# Altium PCB V1_motor driver.PcbDoc
Units mm, origin at the board's own origin, x right, y up, seen from the top; angles counter-clockwise.
Board outline 95 x 120 mm, 2 copper layers (Top Layer, Bottom Layer); 120 components, 81 nets, 314 pads, 68 vias.
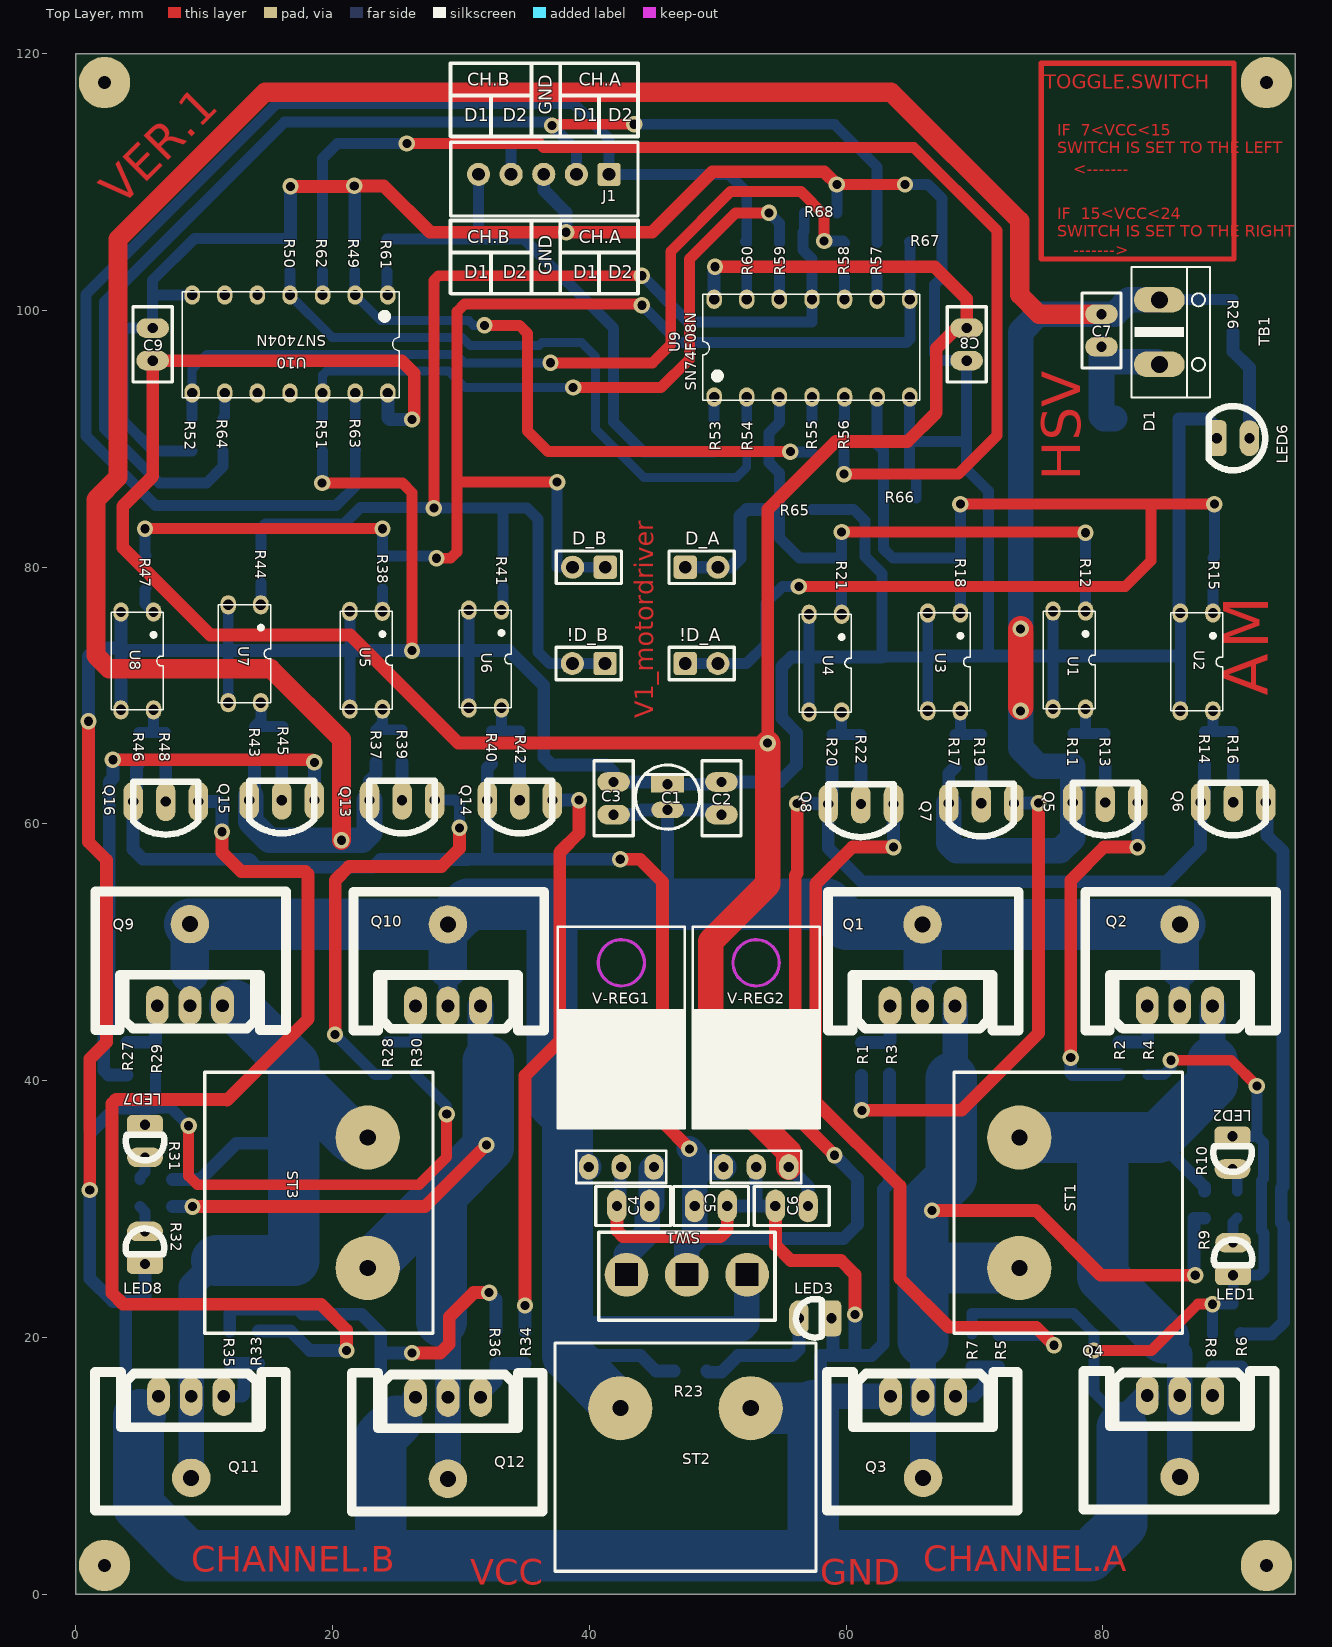
[diagram p0: Top Layer view]
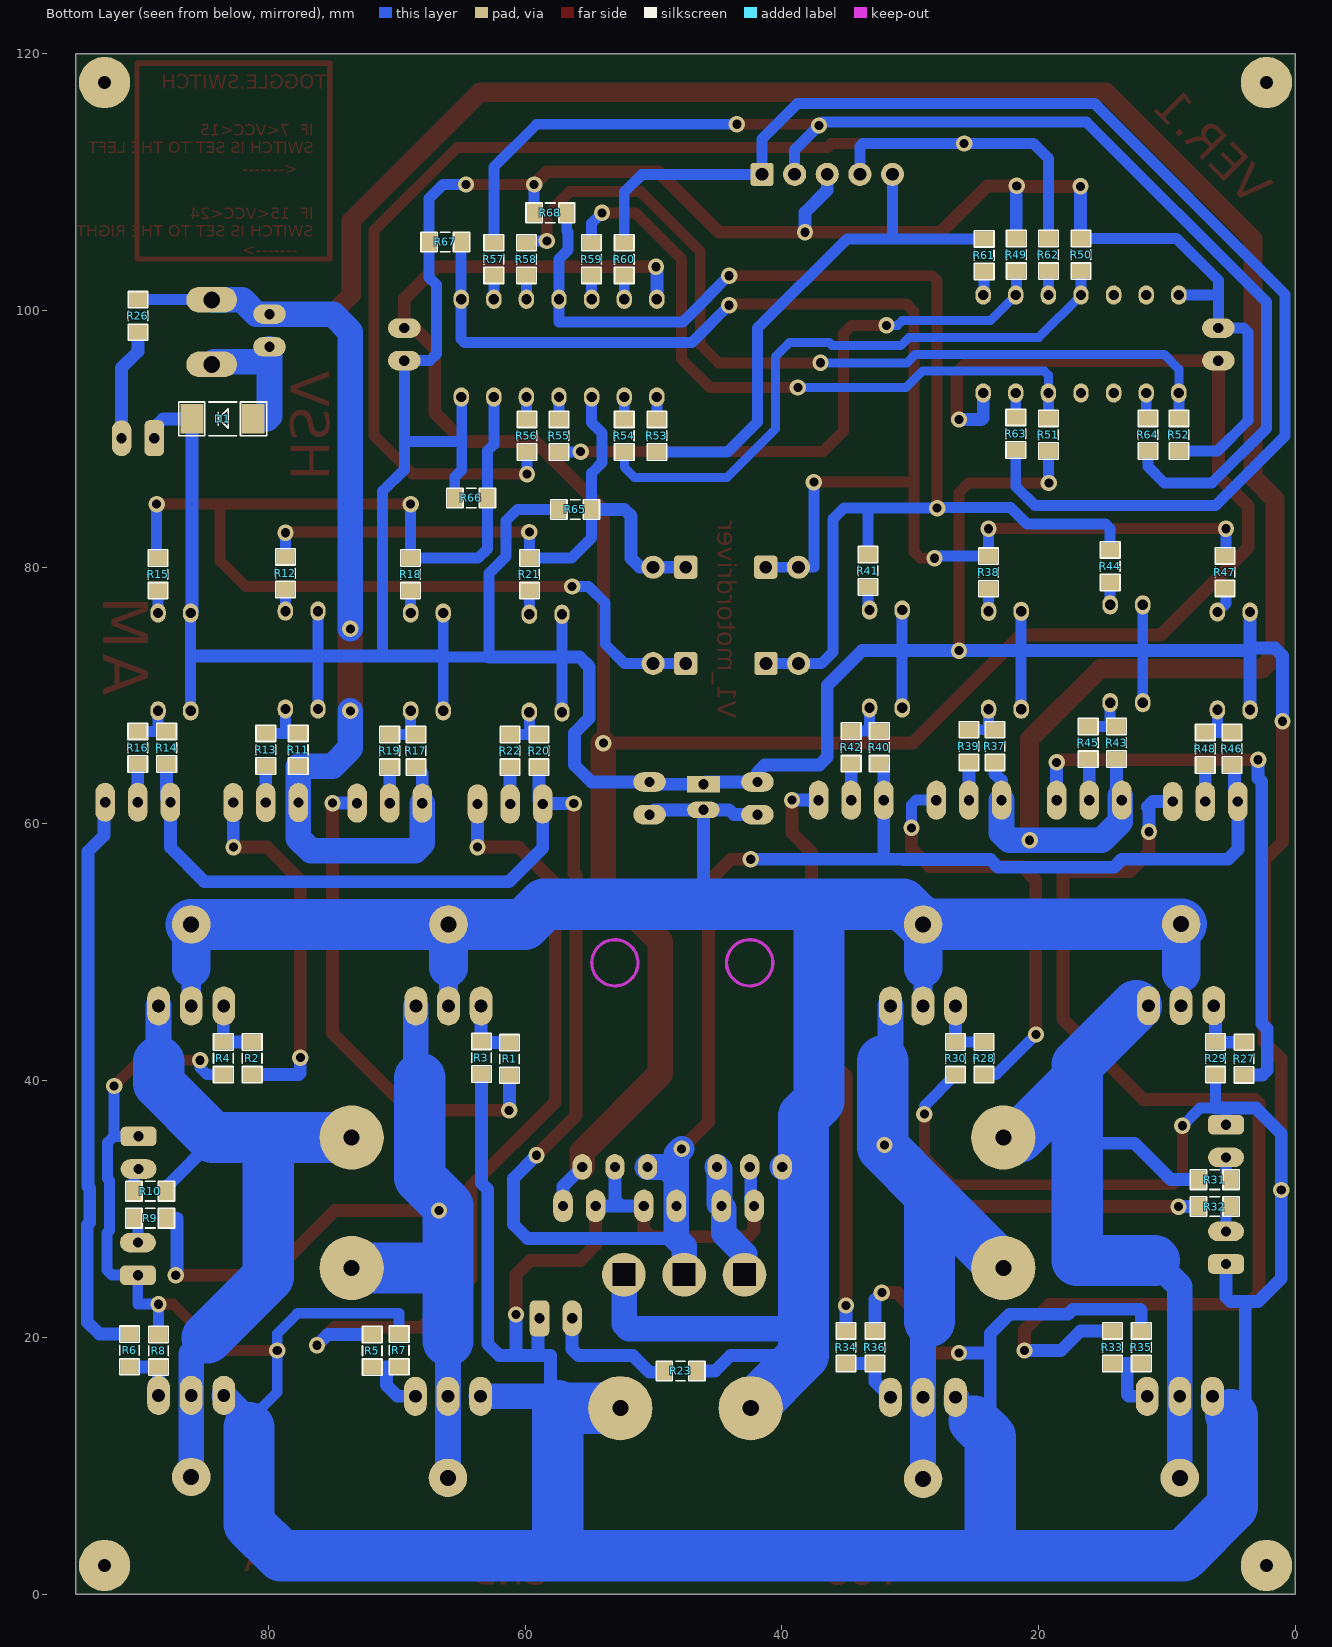
[diagram p1: Bottom Layer view, seen from below]
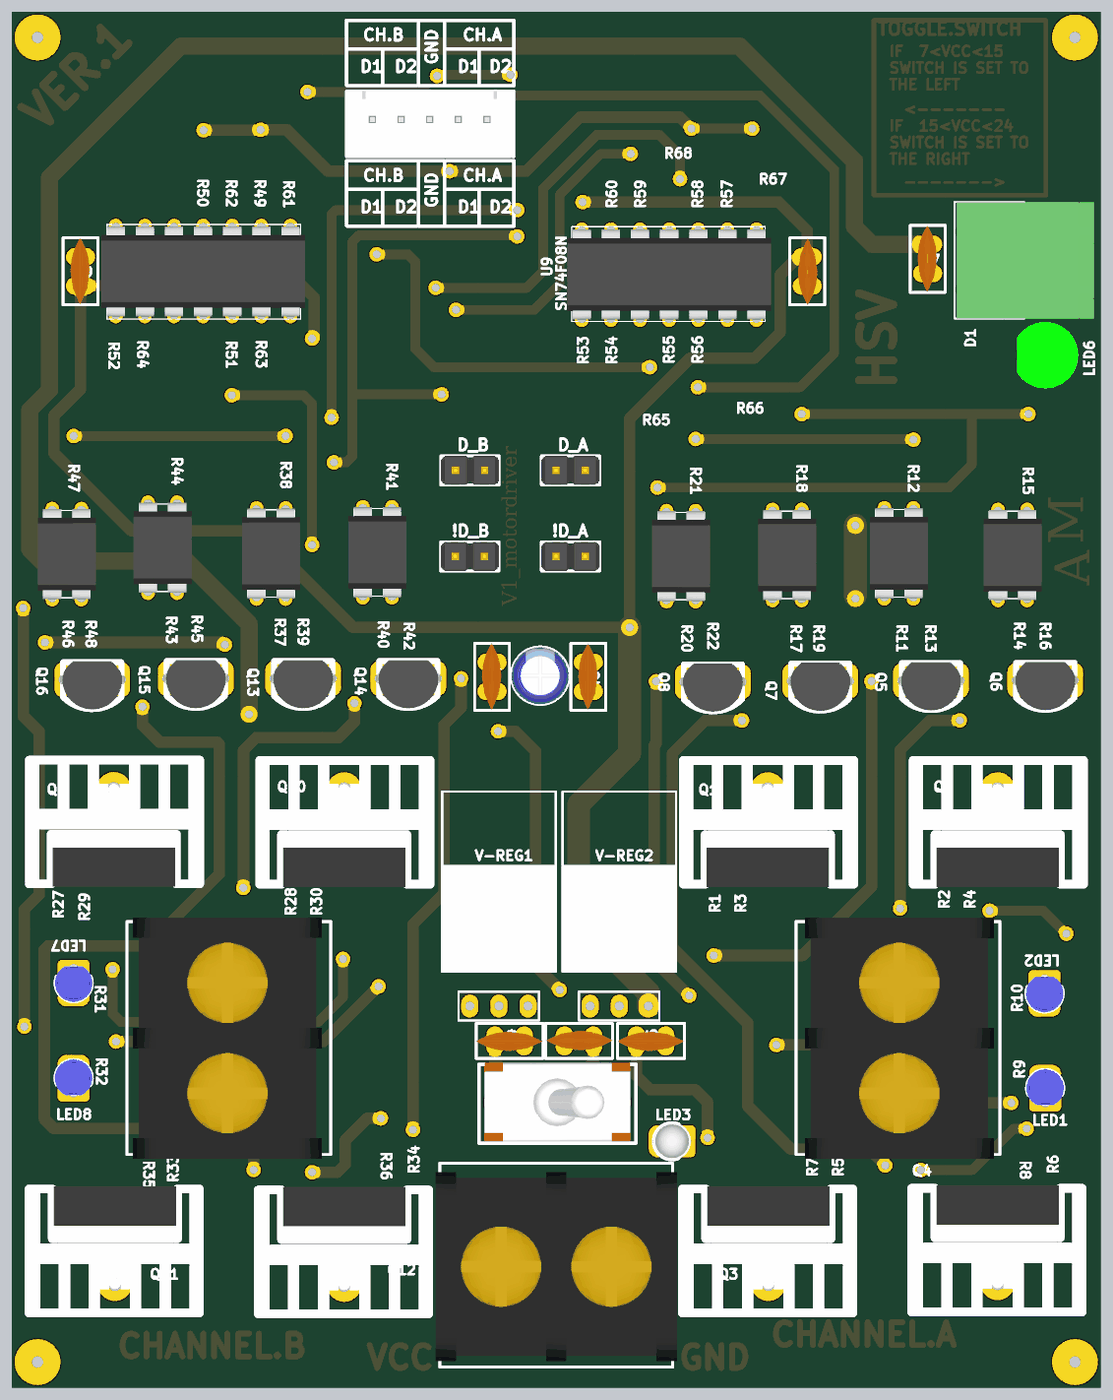
[diagram p2: 3D render of the assembled board from above, using the file's embedded part models]
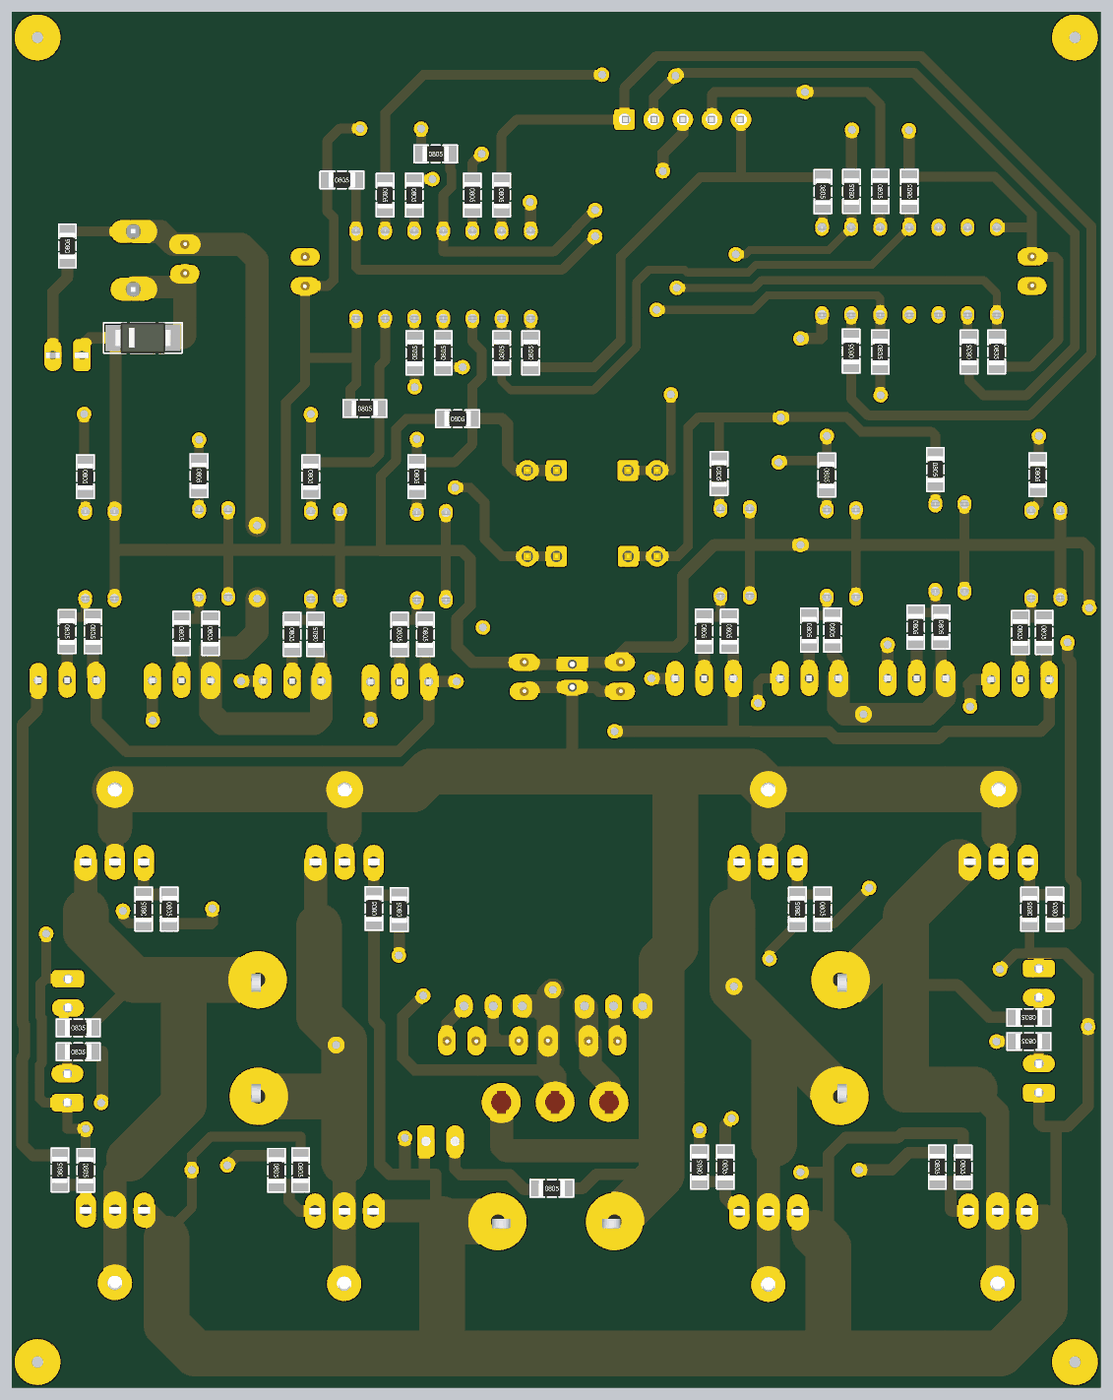
[diagram p3: 3D render of the assembled board from below, using the file's embedded part models]

## Layer stack, top to bottom
Top Solder: solder mask 0.0102, Solder Resist, Dk 3.5
Top Layer: signal copper 0.0356
Dielectric 1: dielectric 0.32, FR-4, Dk 4.8
Bottom Layer: signal copper 0.0356
Bottom Solder: solder mask 0.0102, Solder Resist, Dk 3.5

## Board outline
0,0 95,0 95,120 0,120

## Design rules (kind name [scope] priority, off if disabled: settings)
Clearance [All] p1: gap=0.6 ignorepadtopadclearanceinfootprint=FALSE
PolygonConnect [All] p1: connectstyle=Relief reliefconductorwidth=0.254 reliefentries=4 polygonreliefangle="90 Angle" airgapwidth=0.254
RoutingVias [All] p1: holewidth=0.6 width=1.3 viastyle="Through Hole" minholewidth=0.711 minwidth=1.27 maxholewidth=0.711 maxwidth=1.27
SolderMaskExpansion [All] p1: expansion=0.102
UnRoutedNet [All] p1: checkbadconnections=TRUE
Width [All] p1: maxlimit=10 minlimit=0.7 preferedwidth=0.85
29 further rules are at their usual default settings.

## Classes and differential pairs
component class RLS: Q6 Q14 R14 R15 R16 R40 R41 R42 U2 U6
component class RHS: D_A D_B Q5 Q13 R11 R12 R13 R37 R38 R39 U1 U5
component class POWER: C1 C2 C3 C4 C5 C6 C7 D1 LED3 LED6 R23 R26 ST2 SW1 TB1 V-REG1 V-REG2
component class LOGIC: C8 C9 J1 R49 R50 R51 R52 R53 R54 R55 R56 R57 R58 R59 R60 R61 R62 R63 R64 R65 R66 R67 R68 U9 U10
component class LLS: Q8 Q16 R20 R21 R22 R46 R47 R48 U4 U8
component class LHS: !D_A !D_B Q7 Q15 R17 R18 R19 R43 R44 R45 U3 U7
component class H_bridge: LED1 LED2 LED7 LED8 Q1 Q2 Q3 Q4 Q9 Q10 Q11 Q12 R1 R2 R3 R4 R5 R6 R7 R8 R9 R10 R27 R28 R29 R30 R31 R32 R33 R34 R35 R36 ST1 ST3

## Components (designator, comment, footprint, x,y, rotation, side; value= is the part's Value field where it differs from the comment)
!D_A "Header 2" "PINHEADER X2" 48.75,72.5 r0 top
!D_B "Header 2" "PINHEADER X2" 39.96,72.5 r180 top
C1 "100uF" "ECAP 5X11X2MM" 46.1,62.1 r90 top
C2 "100nF" "CCAP 0.1 N Y" 50.3,62 r90 top
C3 "100nF" "CCAP 0.1 N Y" 41.9,62 r90 top
C4 "1uF" "CCAP 0.1 N Y" 43.43,30.25 r180 top
C5 "100nF" "CCAP 0.1 N Y" 49.48,30.25 r0 top
C6 "1uF" "CCAP 0.1 N Y" 55.77,30.25 r180 top
C7 "1uF" "CCAP 0.1 N Y" 79.9,98.44 r90 top
C8 "100nF" "CCAP 0.1 N Y" 69.4,97.355 r270 top
C9 "100nF" "CCAP 0.1 N Y" 6,97.355 r90 top
D1 "DIODE" "DIODE SMD" 83.552,91.563 r90 bottom
D_A "Header 2" "PINHEADER X2" 48.75,80 r0 top
D_B "RHS_2" "PINHEADER X2" 39.98,80 r180 top
J1 "DATA CONNECTOR *5" "MOLEX *5_DATA CONNECTOR" 36.46,110.6 r180 top
LED1 "LED" "LED 3MM BLUE" 90.15,26.13 r270 top
LED2 "LED" "LED 3MM BLUE" 90.1,34.4 r90 top
LED3 "LED" "LED 3MM GREEN" 57.6,21.5 r0 top
LED6 "LED" "LED 5MM GREEN" 90.15,90.05 r180 top
LED7 "LED" "LED 3MM BLUE" 5.4,35.3 r90 top
LED8 "LED" "LED 3MM BLUE" 5.4,27 r270 top
Q1 "IRF3205" "Transistor - duplicate2" 65.96,49 r0 top
Q2 "IRF3205" "Transistor - duplicate2" 86,49 r0 top
Q3 "IRF3205" "Transistor - duplicate2" 66,12.25 r180 top
Q4 "IRF3205" "Transistor - duplicate2" 86,12.325 r180 top
Q5 "BC327" "Transistor - duplicate3" 80.19,61.67 r180 top
Q6 "BC327" "Transistor - duplicate3" 90.16,61.694 r180 top
Q7 "BC327" "Transistor - duplicate3" 70.54,61.624 r180 top
Q8 "BC327" "Transistor - duplicate3" 61.16,61.559 r180 top
Q9 "IRF3205" "Transistor - duplicate2" 8.9,49.025 r0 top
Q10 "IRF3205" "Transistor - duplicate2" 29,49 r0 top
Q11 "IRF3205" "Transistor - duplicate2" 9,12.25 r180 top
Q12 "IRF3205" "Transistor - duplicate2" 29,12.175 r180 top
Q13 "BC327" "Transistor - duplicate3" 25.426,61.854 r180 top
Q14 "BC327" "Transistor - duplicate3" 34.596,61.854 r180 top
Q15 "BC327" "Transistor - duplicate3" 16.056,61.86 r180 top
Q16 "BC327" "Transistor - duplicate3" 7.02,61.75 r180 top
R1 "1.6R" "RESISTOR _9" 61.2,41.7 r0 bottom
R2 "1.6R" "RESISTOR _9" 81.25,41.75 r180 bottom
R3 "10K" "RESISTOR _9" 63.4,41.8 r0 bottom
R4 "10K" "RESISTOR _9" 83.5,41.75 r0 bottom
R5 "1.6R" "RESISTOR _9" 71.9,18.97 r180 bottom
R6 "1k" "RESISTOR _9" 90.8,19 r0 bottom
R7 "10K" "RESISTOR _9" 69.8,19 r180 bottom
R8 "10K" "RESISTOR _9" 88.54,18.97 r180 bottom
R9 "1k" "RESISTOR _9" 89.2,29.3 r90 bottom
R10 "1k" "RESISTOR _9" 89.2,31.4 r90 bottom
R11 "10K" "RESISTOR _9" 77.66,65.786 r180 bottom
R12 "330R" "RESISTOR _9" 78.66,79.536 r180 bottom
R13 "1k" "RESISTOR _9" 80.19,65.786 r180 bottom
R14 "10K" "RESISTOR _9" 87.91,65.944 r180 bottom
R15 "330R" "RESISTOR _9" 88.58,79.444 r180 bottom
R16 "1k" "RESISTOR _9" 90.16,65.944 r180 bottom
R17 "10K" "RESISTOR _9" 68.5,65.694 r0 bottom
R18 "330R" "RESISTOR _9" 68.91,79.444 r180 bottom
R19 "1k" "RESISTOR _9" 70.54,65.694 r180 bottom
R20 "10K" "RESISTOR _9" 58.91,65.694 r180 bottom
R21 "330R" "RESISTOR _9" 59.66,79.444 r180 bottom
R22 "1k" "RESISTOR _9" 61.16,65.694 r180 bottom
R23 "1k" "RESISTOR _9" 47.888,17.4 r90 bottom
R26 "1k" "RESISTOR _9" 90.15,99.57 r0 bottom
R27 "1.6R" "RESISTOR _9" 4,41.73 r0 bottom
R28 "1.6R" "RESISTOR _9" 24.25,41.75 r180 bottom
R29 "10K" "RESISTOR _9" 6.21,41.75 r0 bottom
R30 "10K" "RESISTOR _9" 26.46,41.75 r0 bottom
R31 "1k" "RESISTOR _9" 6.27,32.3 r270 bottom
R32 "1k" "RESISTOR _9" 6.27,30.2 r270 bottom
R33 "1.6R" "RESISTOR _9" 14.25,19.25 r180 bottom
R34 "1k" "RESISTOR _9" 35,19.25 r0 bottom
R35 "10K" "RESISTOR _9" 12,19.25 r180 bottom
R36 "10K" "RESISTOR _9" 32.75,19.25 r180 bottom
R37 "10K" "RESISTOR _9" 23.396,66.07 r180 bottom
R38 "330R" "RESISTOR _9" 23.896,79.59 r180 bottom
R39 "1k" "RESISTOR _9" 25.426,66.07 r180 bottom
R40 "10K" "RESISTOR _9" 32.404,65.974 r180 bottom
R41 "330R" "RESISTOR _9" 33.293,79.724 r180 bottom
R42 "1k" "RESISTOR _9" 34.596,65.974 r180 bottom
R43 "10K" "RESISTOR _9" 13.926,66.33 r180 bottom
R44 "330R" "RESISTOR _9" 14.426,80.08 r180 bottom
R45 "1k" "RESISTOR _9" 16.136,66.32 r180 bottom
R46 "10K" "RESISTOR _9" 4.94,65.87 r180 bottom
R47 "330R" "RESISTOR _9" 5.49,79.62 r180 bottom
R48 "1K" "RESISTOR _9" 7.02,65.87 r180 bottom
R49 "10K" "RESISTOR _9" 21.736,104.325 r0 bottom
R50 "10K" "RESISTOR _9" 16.696,104.325 r0 bottom
R51 "10K" "RESISTOR _9" 19.236,90.325 r180 bottom
R52 "10K" "RESISTOR _9" 9.076,90.325 r180 bottom
R53 "22R" "RESISTOR _9" 49.73,90.25 r0 bottom
R54 "22R" "RESISTOR _9" 52.27,90.25 r0 bottom
R55 "22R" "RESISTOR _9" 57.35,90.25 r0 bottom
R56 "22R" "RESISTOR _9" 59.85,90.25 r0 bottom
R57 "22R" "RESISTOR _9" 62.43,104 r180 bottom
R58 "22R" "RESISTOR _9" 59.89,104 r180 bottom
R59 "22R" "RESISTOR _9" 54.81,104 r180 bottom
R60 "22R" "RESISTOR _9" 52.27,104 r180 bottom
R61 "22R" "RESISTOR _9" 24.236,104.305 r180 bottom
R62 "22R" "RESISTOR _9" 19.236,104.325 r180 bottom
R63 "22R" "RESISTOR _9" 21.776,90.405 r0 bottom
R64 "22R" "RESISTOR _9" 11.486,90.325 r0 bottom
R65 "10K" "RESISTOR _9" 56.1,84.5 r90 bottom
R66 "10K" "RESISTOR _9" 64.2,85.4 r90 bottom
R67 "10K" "RESISTOR _9" 66.2,105.33 r90 bottom
R68 "10K" "RESISTOR _9" 58.02,107.6 r90 bottom
ST1 "SCREW TERMINAL" "SCREW TERMINAL" 73.5,30.5 r90 top
ST2 "SCREW TERMINAL" "SCREW TERMINAL" 47.5,14.5 r0 top
ST3 "SCREW TERMINAL" "SCREW TERMINAL" 22.75,30.5 r270 top
SW1 "Toggle Switch" "Toggle 3 pins" 47.6,24.9 r180 top
TB1 "Terminal block 2 pin" "AK500/2 - pluggable" 84.4,98.315 r90 top
U1 "PC817" "IC X4 PIN" 77.39,72.77 r270 top
U2 "PC817" "IC X4 PIN" 87.31,72.624 r270 top
U3 "PC817" "IC X4 PIN" 67.64,72.624 r270 top
U4 "PC817" "IC X4 PIN" 58.39,72.524 r270 top
U5 "PC817" "IC X4 PIN" 22.626,72.754 r270 top
U6 "PC817" "IC X4 PIN" 31.896,72.854 r270 top
U7 "PC817" "IC X4 PIN" 13.156,73.26 r270 top
U8 "PC817" "IC X4 PIN" 4.8,72.7 r270 top
U9 "SN74F08N" "IC X14 PIN" 57.35,97.06 r90 top
U10 "SN7404N" "IC X14 PIN" 16.696,97.385 r270 top
V-REG1 "7812" V-REG 42.5,33.29 r0 top
V-REG2 "7805" V-REG 53,33.29 r0 top

## Footprints (in the part's own frame and the unit in brackets; to place one, negate y for a bottom-side part, rotate by r counter-clockwise, add the part's x,y. Pads: shape width x height; smd on the part's side, far side on the other; paste and mask are expansions set on the pad)
"AK500/2 - pluggable" [mil]
  oval 78x156 hole 52: 1(99,0) 2(-99,0)
  silkscreen extent -200,-155 200,85, body extent -200,-394 200,79, height 336
"CCAP 0.1 N Y" [mil] "CERAMIC CAP"
  oval 60x100 hole 31.5: 1(-50,0) 2(50,0)
  silkscreen extent -115,-60 115,60, body extent -114,-32 116,35, height 265
"DIODE SMD" [mil]
  rect 90x70 smd: A(0.5,-94) K(-0.5,94)
  silkscreen extent -53,-135 52,135, body extent -53,-98 53,99, height 87
"ECAP 5X11X2MM" [mm] "polarized cap"
  oval 1.27x2.54 hole 0.8: A(-1,0)
  rect 1.27x2.54 hole 0.8: K(1,0)
  silkscreen extent -2.5,-2.5 2.5,2.5, body extent -2.5,-2.5 2.5,2.5, height 11.26
"IC X4 PIN" [mm]
  oval 1.5x1.2 hole 0.8: 1(-3.81,1.27) 2(-3.81,-1.27) 3(3.81,-1.27) 4(3.81,1.27)
  silkscreen extent -3.81,-2.03 3.81,2.03, body extent -3.93,-2.54 3.93,2.54, height 4.19
"IC X14 PIN" [mm]
  oval 1.5x1.2 hole 0.8: 1(-3.81,7.62) 2(-3.81,5.08) 3(-3.81,2.54) 4(-3.81,0) 5(-3.81,-2.54) 6(-3.81,-5.08) 7(-3.81,-7.62) 8(3.81,-7.62) 9(3.81,-5.08) 10(3.81,-2.54) 11(3.81,0) 12(3.81,2.54) 13(3.81,5.08) 14(3.81,7.62)
  silkscreen extent -4.06,-8.38 4.19,8.51, body extent -3.9,-8.89 3.97,8.89, height 4.1
"LED 3MM BLUE" [mil]
  oval 60x110 hole 31.5: A(-50,0)
  rrect50% 60x110 hole 31.5: K(50,0)
  silkscreen extent -59,-59 20,59, body extent -65,-65 61,65, height 183
"LED 3MM GREEN" [mil]
  oval 60x110 hole 31.5: A(-50,0)
  rrect50% 60x110 hole 31.5: K(50,0)
  silkscreen extent -59,-59 20,59, body extent -65,-65 65,65, height 204
"LED 5MM GREEN" [mil]
  oval 60x110 hole 31.5: A(-50,0)
  rrect50% 60x110 hole 31.5: K(50,0)
  silkscreen extent -98,-98 75,98, body extent -114,-114 98,114, height 346
"MOLEX *5_DATA CONNECTOR" [mm]
  rrect25% 1.8x1.8 hole 1: 1(-5.08,0)
  round 1.8 hole 1: 2(-2.54,0) 3(0,0) 4(2.54,0) 5(5.08,0)
  silkscreen extent -7.34,-2.49 7.25,3.25, body extent -7.34,-2.49 7.34,3.35, height 7.21
"PINHEADER X2" [mm]
  rrect25% 1.8x1.8 hole 1: 1(-1.27,0)
  round 1.8 hole 1: 2(1.27,0)
  silkscreen extent -2.54,-1.27 2.54,1.27, body extent -2.54,-1.27 2.54,1.27, height 9.5
"RESISTOR _9" [mil]
  rect 56x46 smd: 1(0,50) 2(0,-50)
  silkscreen extent -30,-75 30,75, body extent -27,-45 27,45, height 28
"SCREW TERMINAL" [mm]
  round 5 hole 1.25: 1(-5.08,0) 2(5.08,0)
  silkscreen extent -10.16,-12.7 10.16,5.08, body extent -10.53,-12.18 10.52,4.32, height 18.5
"Toggle 3 pins" [mm]
  round 3.4 hole 1.75 square: 1(-4.699,0) 2(0,0) 3(4.699,0)
  silkscreen extent -6.86,-3.3 6.86,3.56, body extent -6.35,-3.43 6.35,3.43, height 28.75
"Transistor - duplicate2" [mm] "TO-220_HS"
  oval 1.778x3.048 hole 1: 1(-2.54,-3.175) 2(0,-3.175) 3(2.54,-3.175)
  round 3 hole 1.25: 2(0,3.175)
  silkscreen extent -7.37,-5.08 7.49,5.72, body extent -7.49,-5.33 7.51,5.67, height 20
"Transistor - duplicate3" [mil] "TO-92-S"
  oval 60x120 hole 31.5: 1(100,0) 2(0,0) 3(-100,0)
  silkscreen extent -100,-60 100,101, body extent -110,-63 110,102, height 294
V-REG [mm]
  oval 1.5x2 hole 0.8: 1(-2.54,0) 2(0,0) 3(2.54,0)
  Keep-Out Layer circle w0.254: c0,15.9 r1.8
  silkscreen extent -4.95,-1.25 4.95,18.7

## Part data
!D_A !D_B D_A: "Header, 2-Pin", LatestRevisionDate=17-Jul-2002, LatestRevisionNote="Re-released for DXP Platform.", Publisher="Altium Limited"
C1: library part "CAP POL"
C2 C3 C4 C5 C6 C7 C8 C9: library part "CERAMIC CAP"
D_B: library part "Header 2", "Header, 2-Pin", LatestRevisionDate=17-Jul-2002, LatestRevisionNote="Re-released for DXP Platform.", Publisher="Altium Limited"
J1: "Data Cable JST 5-pin"
Q1 Q2 Q3 Q4 Q9 Q10 Q11 Q12: library part MOSFET-N, "N CHANNEL MOSFET"
Q5 Q6 Q7 Q8 Q13 Q14 Q15 Q16: library part PNP
R1 R2 R3 R4 R5 R6 R7 R8 R9 R10 R11 R12 R13 R14 R15 R16 R17 R18 R19 R20 R21 R22 R23 R26 R27 R28 R29 R30 R31 R32 R33 R34 R35 R36 R37 R38 R39 R40 R41 R42 R43 R44 R45 R46 R47 R48 R49 R50 R51 R52 R53 R54 R55 R56 R57 R58 R59 R60 R61 R62 R63 R64 R65 R66 R67 R68: library part RESISTOR
ST1 ST2 ST3: "Barrier Terminal Block 2 Pin with cover 300V/25A"
SW1: "Toggle Switch 3-Pin SPDT ON-ON 6A 125VAC"
TB1: "Terminal Block 2 Pin 10A 300V"
U1 U2 U3 U4 U5 U6 U7 U8: library part Opto-coupler, "4-Pin Phototransistor Optocoupler", DatasheetVersion=Nov-2003, LatestRevisionDate=04-Mar-2005, LatestRevisionNote="Sch pins 3 & 4 Swapped.", PackageReference=DIP-4, Published=24-Mar-1999, Publisher="Altium Limited"
U9: library part "7408  (AND)", "AND Gate 4-Element 2-IN Bipolar 14-Pin PDIP AND Gate 4-Element 2-IN Bipolar 14-Pin PDIP", Package="DIP-14 Texas Instruments", Availability=Good, MF="Texas Instruments", MP=SN74F08N, Price="0.36 USD", SnapEDA_Link=https://www.snapeda.com/parts/SN74F08N/Texas%20Instruments/view-part/?ref=snap
U10: library part "7404  (NOT)", "Inverter 6-Element Bipolar 14-Pin PDIP Tube", Package="DIP-14 Texas Instruments", Availability=Good, MF="Texas Instruments", MP=SN7404N, Price="1.26 USD", SnapEDA_Link=https://www.snapeda.com/parts/SN7404N/Texas%20Instruments/view-part/?ref=snap
V-REG1 V-REG2: library part V-REG, "78xx Regulators"

## Free pads (board coordinates)
  round 4 hole 1: //(2.25,2.25) //(2.25,117.75) //(92.75,2.25) //(92.75,117.75)

## Via types
v1: diameter 1.27, hole 0.711, Top Layer to Bottom Layer, 68 vias

## Nets (pads, with @x,y where several pads share a name; then routed paths per layer and width w, separated by ;. In a path a pad name is that pad's centre, name@x,y a point inside that pad or via, vN(x,y) a via of type N, cw(c..) or ccw(c..) an arc to the next point about the centre after c; other vN are vias at no path point)
!A1: R49.1 R55.1 U10.2 | length 47.2
  Top Layer w0.85: v1(31.84,98.84) 34.56,98.84 35.2,98.2 35.2,90.6 36.8,89 v1(55.669,89)
  Bottom Layer w0.7: U10.2 23.761,99.21 30.63,99.21 31,98.84 v1(31.84,98.84)
  Bottom Layer w0.85: R49.1 21.736,101.235 U10.2 ; v1(55.669,89) 55.669,88.861 55.73,88.8 55.91,88.98 R55.1
!A2: R51.1 R59.1 U10.12 | length 51.7
  Top Layer w0.85: v1(38.75,94) 45.6,94 47.8,96.2 47.8,104 51.4,107.6 v1(54,107.6)
  Bottom Layer w0.7: U10.12 19.236,94.967 19.544,95.275 29.05,95.275 30.325,94 v1(38.75,94)
  Bottom Layer w0.85: R51.1 U10.12 ; v1(54,107.6) 54.81,106.79 R59.1
!B1: R50.1 R54.1 U10.4 | length 48.3
  Bottom Layer w0.7: U10.4 19.981,97.91 30.092,97.91 30.747,97.255 36.073,97.255 36.323,97.505 39.39,97.505 40.505,96.39 40.505,90.75 44.255,87 51.48,87 52.27,87.79 R54.1
  Bottom Layer w0.85: U10.4 R50.1
!B2: R52.1 R58.1 U10.8 | length 68
  Top Layer w0.85: v1(36.98,95.92) 44.92,95.92 46.35,97.35 46.35,104.601 51.009,109.26 56.49,109.26 58.3,107.45 v1(58.3,105.4)
  Bottom Layer w0.7: U10.8 9.076,95.431 10.22,96.575 29.588,96.575 30.248,95.915 36.975,95.915 v1(36.98,95.92)
  Bottom Layer w0.85: R52.1 U10.8 ; v1(58.3,105.4) 59.76,105.4 R58.1
A1: J1.5 R53.1 R61.1 | length 41.6
  Bottom Layer w0.85: R61.1 34.925,105.575 41.88,98.62 41.88,91.32 44.22,88.98 R53.1 ; 31.38,105.6 J1.5
A2: J1.2 R57.1 R64.1 | length 100.6
  Top Layer w0.85: v1(37.1,114.4) 37.2,114.5 v1(43.5,114.5)
  Bottom Layer w0.85: R64.1 11.486,87.831 10.21,86.555 6.51,86.555 2.255,90.81 2.255,100.655 16.26,114.66 36.84,114.66 v1(37.1,114.4) 39,112.5 J1.2 ; v1(43.5,114.5) 59.09,114.5 62.43,111.16 R57.1
A_D1: D_A.1 D_A.2 R12.1 R21.1 R65.2 U9.3 | length 51.2
  Top Layer w0.85: v1(59.66,82.74) 78.6,82.74 v1(78.66,82.68)
  Bottom Layer w0.85: U9.3@54.83,93.23 54.83,91.278 54.009,90.457 54.009,88.143 54.83,87.322 R65.2 54.83,82.27 56.386,80.714 R21.1 v1(59.66,82.74) ; R12.1 v1(78.66,82.68)
  Bottom Layer w1: D_A.1 D_A.2 51.05,80 51.75,80.7 51.75,84 52.25,84.5 R65.2 ; U9.3 U9.3@54.83,93.23
A_D2: !D_A.1 !D_A.2 R15.1 R18.1 R66.2 U9.6 | length 92.4
  Top Layer w0.85: v1(56.33,78.5) 81.75,78.5 83.75,80.5 83.75,84.91 ; v1(68.91,84.91) 83.75,84.91 ; v1(88.69,84.91) 83.75,84.91
  Bottom Layer w0.85: !D_A.1 !D_A.2 52.25,72.5 53.75,74 53.75,77.204 55.046,78.5 v1(56.33,78.5) ; U9.6 62.43,89.57 62.93,89.07 R66.2 62.93,81.43 63.646,80.714 R18.1 v1(68.91,84.91) ; R15.1 88.69,80.824 v1(88.69,84.91)
B1: J1.4 R56.1 R62.1 | length 103.3
  Top Layer w0.85: v1(25.8,113) 36.152,113 36.452,112.7 65.28,112.7 71.75,106.23 71.75,90.25 68.75,87.25 v1(59.85,87.25)
  Bottom Layer w0.85: R62.1 19.236,111.836 20.4,113 v1(25.8,113) 33.7,113 33.92,112.78 J1.4 ; v1(59.85,87.25) R56.1
B2: J1.1 R60.1 R63.1 | length 103.9
  Bottom Layer w0.85: R63.1@21.791,89.12 R63.1 21.776,86.29 20.291,84.805 6.209,84.805 0.805,90.209 0.805,101.256 15.659,116.11 38.79,116.11 41.54,113.36 J1.1 50.9,110.6 52.27,109.23 R60.1 R60.1@52.18,105.36
B_D1: D_B.1 D_B.2 R38.1 R47.1 R67.2 U9.8 | length 110.1
  Top Layer w0.85: v1(5.4,83) v1(23.896,83) ; v1(28.1,80.7) 29.2,80.7 29.7,81.2 29.7,99.9 30.3,100.5 44,100.5 v1(44.1,100.4) ; 29.8,86.75 29.925,86.625 v1(37.5,86.625)
  Bottom Layer w0.85: v1(5.4,83) 5.4,80.98 R47.1 ; v1(23.896,83) R38.1 27.94,80.86 v1(28.1,80.7) ; v1(37.5,86.625) 37.5,80 D_B.2 D_B.1 ; v1(44.1,100.4) 46.995,97.505 64.705,97.505 64.97,97.77 U9.8 64.97,105.29 R67.2
B_D2: !D_B.1 !D_B.2 R41.1 R44.1 R68.2 U9.11 | length 101.6
  Top Layer w0.85: v1(27.9,84.6) 27.9,102.345 28.255,102.7 v1(44.1,102.7)
  Bottom Layer w0.85: R44.1 14.426,83 14.781,83.355 20.891,83.355 22.196,84.66 27.84,84.66 v1(27.9,84.6) 33.293,84.6 ; R41.1 33.293,84.6 ; !D_B.1 !D_B.2 36.907,72.5 36,73.407 36,83.75 35.15,84.6 33.293,84.6 ; v1(44.1,102.7) 44.148,102.7 45.76,101.088 45.76,101.04 47.705,99.095 57.35,99.095 U9.11 57.35,104.002 56.64,104.712 56.64,106.087 56.75,106.198 R68.2
GND: C1.K C2.2 C3.2 C4.2 C5.2 C6.2 C8.2 C9.2 D1.K J1.3 LED1.K LED2.K LED3.K LED6.K LED7.K LED8.K Q3.3 Q4.3 Q11.3 Q12.3 R3.1 R4.1 R7.1 R8.1 R29.1 R30.1 R35.1 R36.1 R49.2 R50.2 R51.2 R52.2 R65.1 R66.1 R67.1 R68.1 ST2.2 U1.2 U1.3 U2.2 U2.3 U3.2 U3.3 U4.2 U4.3 U5.2 U5.3 U6.2 U6.3 U7.2 U7.3 U8.2 U8.3 U9.7 U10.7 V-REG1.2 V-REG2.2 | length 801.5
  Top Layer w0.85: v1(8.8,36.5) 8.8,32.6 9.5,31.9 26.743,31.9 28.9,34.057 v1(28.9,37.4) ; v1(19.2,86.555) 25.445,86.555 26.2,85.8 v1(26.2,73.5) ; v1(59.29,109.8) v1(64.6,109.8) ; v1(79.3,19) 83.8,19 87.4,22.6 v1(88.54,22.6) ; v1(85.3,41.6) 90,41.6 v1(92,39.6)
  Top Layer w1: v1(1,68) 1,58.6 2.4,57.2 2.4,43 1.1,41.7 v1(1.1,31.5) ; v1(16.735,109.661) 21.661,109.661 v1(21.7,109.7) 24,109.7 27.613,106.087 v1(38.2,106.087) 44.887,106.087 49.6,110.8 58.29,110.8 v1(59.29,109.8) ; v1(26.2,18.8) 28.4,18.8 29.1,19.5 29.1,21.6 31,23.5 v1(32.204,23.5) ; C4.2 42.16,28.34 42.65,27.85 50.21,27.85 50.75,28.39 C5.2 ; C6.2 54.5,27.2 55.7,26 59.6,26 60.7,24.9 v1(60.7,21.8)
  Bottom Layer w0.85: 3.9,14.865 4.9,13.865 ; LED7.K 5.4,37.88 ; R29.1 6.21,37.88 7.42,37.88 v1(8.8,36.5) ; R52.2 6.061,89.055 3.705,91.411 3.705,98.3 4.03,98.625 C9.2 6,101.195 ; U10.7 6,101.195 ; U7.3 11.886,73.5 U7.2 ; 12,22.1 12.029,22.129 ; R50.2 9.246,105.595 6,102.349 6,101.195 ; v1(19.2,86.555) 19.236,86.591 R51.2 ; U5.3 21.356,73.5 U5.2 ; R30.1 28.9,38.04 v1(28.9,37.4) ; 30.426,73.5 30.626,73.3 ; U6.3 30.626,73.3 ; U6.2 30.626,73.5 30.626,73.3 ; U4.3 57.12,73 U4.2 ; R65.1 60.6,84.5 61.48,83.62 61.48,80.829 62.8,79.509 62.8,73 66.37,73 ; 58.02,15.58 58.175,15.425 ; R68.1 v1(59.29,109.8) ; v1(64.6,109.8) 66.4,109.8 67.47,108.73 R67.1 67.47,102.57 66.9,102 66.9,96.6 67.415,96.085 C8.2 69.4,90 ; U9.7 64.93,93.21 64.93,89.8 ; R66.1 65.47,87.03 64.93,87.57 64.93,89.8 ; U3.3 66.37,73 ; U3.2 66.37,73.25 ; 66.545,73.075 66.37,73.25 ; R7.1 69.8,21.895 77.705,21.895 79.3,20.3 v1(79.3,19) 79.3,15.74 81.5,13.54 81.5,13 ; 71.1,73.075 71.1,85.92 69.4,87.62 69.4,90 ; U1.3 76.12,73.075 U1.2 ; R4.1 84.76,40.48 85.3,41.02 v1(85.3,41.6) ; 85.865,73.075 86.04,72.9 ; U2.2@85.94,76.534 U2.2 86.04,72.9 ; U2.3 86.04,72.9 ; R8.1 v1(88.54,22.6) 90.16,22.6 90.16,24.85 LED1.K 92.16,24.86 92.572,25.272 92.572,28.14 92.375,28.337 92.375,32.243 92.522,32.39 92.522,35.178 92,35.7 ; LED2.K 91.97,35.67 92,35.7 ; v1(92,39.6) 92,35.7 ; 64.93,89.8 69.2,89.8 69.4,90 ; 66.37,73 66.37,73.25
  Bottom Layer w1: v1(1,68) 1,73.1 1.6,73.7 3.53,73.7 ; U8.3 3.53,73.7 ; U8.2 3.53,73.7 ; 3.9,14.865 3.9,22.725 3.975,22.8 ; LED8.K@5.3,25.63 LED8.K 5.4,23.15 5.05,22.8 3.975,22.8 ; 6.21,37.88 5.4,37.88 3.08,37.88 1.1,35.9 v1(1.1,31.5) 1.1,24.6 2.9,22.8 3.975,22.8 ; R35.1 12,22.1 ; 12.029,22.129 12.104,22.204 17.322,22.204 17.706,21.82 22.266,21.82 23.76,20.326 23.76,12.26 ; R50.2 16.735,105.634 v1(16.735,109.661) ; v1(21.7,109.7) 21.736,109.664 R49.2 ; 24.3,18.8 v1(26.2,18.8) ; 30.426,73.5 v1(26.2,73.5) 21.356,73.5 11.886,73.5 3.73,73.5 3.53,73.7 ; 30.626,73.5 33.75,73.5 36.46,70.79 36.46,65.214 37.074,64.6 41.324,64.6 41.9,64.024 C3.2 45.93,63.27 C1.K 50.13,63.1 C2.2 54.824,63.27 56.154,64.6 56.154,67.096 55,68.25 55,72.25 55.75,73 57.12,73 62.8,73 ; v1(32.204,23.5) 32.75,22.954 R36.1 ; J1.3 36.46,109.377 38.2,107.637 v1(38.2,106.087) ; C4.2 42.422,30.512 42.422,33.212 V-REG1.2 ; C5.2 52.5,30.25 ; V-REG2.2 53,30.75 52.5,30.25 ; C6.2 52.5,30.25 ; 58.02,15.58 58.02,18.609 59,18.609 ; LED3.K 59,21.37 59,18.609 ; 60.7,19.2 v1(60.7,21.8) ; R3.1 63.4,32.034 62.9,31.534 62.9,19.5 62.009,18.609 59,18.609 ; 66.545,73.075 71.1,73.075 76.12,73.075 85.865,73.075 ; U2.2@85.94,76.534 D1.K 88.2,91.55 88.88,90.87 LED6.K
  Bottom Layer w2: 5.035,14 6.4,15.365 Q11.3@6.4,15.425 ; 25,13.5 26.4,14.9 Q12.3@26.4,15.35 ; 58.175,15.425 Q3.3@63.4,15.425 ; 81.5,13.54 83.4,15.44 Q4.3@83.4,15.5
  Bottom Layer w4: 5.035,14 4.9,13.865 4.9,10.773 4.9,6.85 8.75,3 79,3 81.5,5.5 81.5,13 ; 23.76,4.1 23.76,12.26 25,13.5 ; ST2.2 57.25,14.5 57.46,14.71 57.46,4.1
LHS_Q1_1: Q7.3 R1.1 | length 38.8
  Top Layer w1: v1(61.238,37.7) 69,37.7 75,43.7 v1(75,61.624)
  Bottom Layer w1: R1.1 61.2,37.738 v1(61.238,37.7) ; Q7.3 v1(75,61.624)
LHS_Q1_2: Q15.3 R27.1 | length 45.1
  Top Layer w1: v1(2.9,65) 18.4,65 v1(18.596,64.804)
  Bottom Layer w1: v1(2.9,65) 2.9,63.565 2.618,63.283 2.618,44.469 2.189,44.04 2.189,40.841 2.57,40.46 R27.1 ; Q15.3 v1(18.596,64.804)
LLS_Q3_1: Q8.3 R5.1 | length 62.9
  Top Layer w1: v1(63.7,58.2) 60.5,58.2 57.642,55.342 57.642,38.358 64.2,31.8 64.2,24.6 68,20.8 74.8,20.8 v1(76.2,19.4)
  Bottom Layer w1: v1(63.7,58.2) Q8.3 ; R5.1 75.36,20.24 v1(76.2,19.4)
LLS_Q3_2: Q16.3 R33.1 | length 85.8
  Top Layer w1: v1(11.4,59.4) 11.4,57.8 12.9,56.3 17.9,56.3 18.1,56.1 18.1,44.8 11.8,38.5 11.768,38.532 3.132,38.532 2.835,38.235 2.835,23.465 3.7,22.6 19.1,22.6 21.1,20.6 v1(21.1,19)
  Bottom Layer w1: Q16.3 11.109,61.75 11.54,61.319 11.4,61.179 v1(11.4,59.4) ; R33.1 16.743,20.52 18.263,19 v1(21.1,19)
NetC4_1: C4.1 SW1.3 V-REG1.3 | length 9.3
  Bottom Layer w2: SW1.3 42.901,26.501 44.522,28.122 44.522,30.072 C4.1 44.85,30.4 44.85,33.1 V-REG1.3
NetC7_1: C7.1 D1.A TB1.2 | length 10.9
  Bottom Layer w1: 79.9,91.75 80.075,91.575
  Bottom Layer w2: 79.9,91.75 79.9,96 ; C7.1@79.9,97 79.9,96 ; 80.075,91.575 D1.A@80.91,91.575 ; TB1.2 84.2,96 79.9,96
NetLED1_A: LED1.A R9.1 | length 2
  Bottom Layer w0.85: LED1.A 90.15,28.98 R9.1
NetLED2_A: LED2.A R10.1 | length 1.9
  Bottom Layer w0.85: LED2.A 90.47,32.76 R10.1
NetLED3_A: LED3.A R23.1 | length 10.4
  Bottom Layer w1: R23.1 49.252,17.306 50.294,17.306 51.58,18.591 55.833,18.591 56.33,19.088 LED3.A
NetLED6_A: LED6.A R26.1 | length 8.8
  Bottom Layer w1: R26.1 90.15,96.8 91.42,95.53 LED6.A
NetLED7_A: LED7.A R31.1 | length 1.9
  Bottom Layer w0.85: R31.1 5,32.5 5.4,32.9 LED7.A
NetLED8_A: LED8.A R32.1 | length 2.1
  Bottom Layer w0.85: R32.1 5.4,29.8 LED8.A
NetQ1_1: Q1.1 R1.2 R3.2 | length 5
  Bottom Layer w1: R1.2 63.3,42.97 R3.2 63.42,43.09 Q1.1
NetQ1_3: Q1.3 Q3.2 R9.2 ST1.1 | length 73.1
  Top Layer w1: v1(66.7,29.9) 74.8,29.9 79.85,24.85 v1(87.2,24.85)
  Bottom Layer w1: v1@66.6,30 v1(66.7,29.9) ; v1(87.2,24.85) 87.1,24.95 87.1,29.3 R9.2
  Bottom Layer w2: Q3.2@66,9.075 66,15.425 66,19.75 ; 68.5,40.52 Q1.3
  Bottom Layer w4: 66,19.75 66,24.7 ; 66,29.9 66,24.7 ; 66,30 66,30.25 68.2,32.45 68.2,40.22 ; ST1.1 66.72,25.42 66,24.7
NetQ2_1: Q2.1 R2.1 R4.2 | length 5.1
  Bottom Layer w1: R2.1 R4.2 83.5,45.785 Q2.1
NetQ2_3: Q2.3 Q4.2 R10.2 ST1.2 | length 57.5
  Bottom Layer w1: 84.088,35.58 87.93,31.738 R10.2
  Bottom Layer w2: 84.75,20 86,18.75 86,15.5 Q4.2@86,9.15 ; 88.54,41.5 Q2.3
  Bottom Layer w4: ST1.2 80,35.58 ; 84.75,20 80,24.75 80,35.58 ; 88.54,41.5 88.54,39.79 84.33,35.58 84.088,35.58 80,35.58
NetQ3_1: Q3.1 R5.2 R7.2 | length 6.2
  Bottom Layer w0.85: R5.2@71.87,17.73 R5.2
  Bottom Layer w1: Q3.1 69.925,15.425 70.8,16.3 70.8,17.73 ; R7.2 70.8,17.73 ; R5.2@71.87,17.73 70.8,17.73
NetQ4_1: Q4.1 R6.1 R8.2 | length 4.6
  Bottom Layer w1: Q4.1 88.54,17.376 R8.2@88.864,17.7 ; R8.2 R8.2@88.864,17.7 ; R6.1 90.77,17.7 R8.2@88.864,17.7
NetQ5_2: Q5.2 R13.2 | length 2.8
  Bottom Layer w1: Q5.2 R13.2
NetQ6_2: Q6.2 R16.2 | length 3
  Bottom Layer w1: Q6.2 R16.2
NetQ7_2: Q7.2 R19.2 | length 2.8
  Bottom Layer w1: Q7.2 R19.2
NetQ8_2: Q8.2 R22.2 | length 2.9
  Bottom Layer w1: Q8.2 R22.2
NetQ9_1: Q9.1 R27.2 R29.2 | length 5.1
  Bottom Layer w0.85: R29.2@6.19,43 R29.2
  Bottom Layer w1: R27.2 R29.2@6.19,43 ; R29.2 6.21,45.7 Q9.1
NetQ9_3: Q9.3 Q11.2 R31.2 ST3.1 | length 63.8
  Bottom Layer w1: R31.2 9.69,32.3 12.52,35.13 16.83,35.13 17,35.3
  Bottom Layer w2: Q11.2@9,9.075 9,15.425 9,24 11,26
  Bottom Layer w4: 11,26 17,26 17,35.3 17,40.115 ; 12.389,45.85 17,41.239 17,40.115 ; ST3.1 21.535,35.58 17,40.115
NetQ10_1: Q10.1 R28.1 R30.2 | length 5
  Bottom Layer w0.85: R28.1 R30.2
  Bottom Layer w1: R30.2 Q10.1
NetQ10_3: Q10.3 Q12.2 R32.2 ST3.2 | length 73.1
  Top Layer w1: v1(9.1,30.2) 27.2,30.2 v1(32,35)
  Bottom Layer w1: R32.2 v1(9.1,30.2) ; v1(32,35) v1@32,35.4
  Bottom Layer w2: Q12.2@29,9 29,15.35 29,20.77 ; Q10.3 31.54,42.11 32.14,41.51
  Bottom Layer w4: ST3.2 28.5,31.17 ; 28.5,21.27 28.5,31.17 ; 32.14,41.51 32.14,34.81 28.5,31.17
NetQ11_1: Q11.1 R33.2 R35.2 | length 6.3
  Bottom Layer w1: Q11.1 12.96,15.425 13.1,15.565 13.1,17.98 ; R35.2 13.1,17.98 ; R33.2 13.1,17.98
NetQ12_1: Q12.1 R34.1 R36.2 | length 5.4
  Bottom Layer w1: Q12.1 32.75,16.56 R36.2 R34.1
NetQ13_2: Q13.2 R39.2 | length 2.9
  Bottom Layer w1: Q13.2 R39.2
NetQ14_2: Q14.2 R42.2 | length 2.9
  Bottom Layer w1: Q14.2 R42.2
NetQ15_2: Q15.2 R45.2 | length 3.2
  Bottom Layer w0.85: R45.2@16.056,64.97 R45.2
  Bottom Layer w1: Q15.2 R45.2@16.056,64.97
NetQ16_2: Q16.2 R48.2 | length 2.8
  Bottom Layer w1: Q16.2 R48.2
NetR11_1: R11.1 R13.1 U1.4 | length 4.5
  Bottom Layer w0.85: R11.1 78.75,67.056 ; U1.4 78.66,67.146 78.75,67.056 ; R13.1 78.75,67.056
NetR12_2: R12.2 U1.1 | length 1.7
  Bottom Layer w0.85: U1.1 R12.2
NetR14_1: R14.1 R16.1 U2.4 | length 3.9
  Bottom Layer w0.85: R14.1 88.75,67.214 ; U2.4 88.58,67.384 88.75,67.214 ; R16.1 88.75,67.214
NetR15_2: R15.2 U2.1 | length 1.7
  Bottom Layer w0.85: U2.1 R15.2
NetR17_2: R17.2 R19.1 U3.4 | length 3.5
  Bottom Layer w0.85: R17.2 R19.1 ; R17.2@68.91,67.374 U3.4
NetR18_2: R18.2 U3.1 | length 1.7
  Bottom Layer w0.85: U3.1 R18.2
NetR20_1: R20.1 R22.1 U4.4 | length 4
  Bottom Layer w0.85: R20.1 59.75,66.964 ; U4.4 59.66,67.054 59.75,66.964 ; R22.1 59.75,66.964
NetR21_2: R21.2 U4.1 | length 1.8
  Bottom Layer w0.85: U4.1 R21.2
NetR37_1: R37.1 R39.1 U5.4 | length 3.8
  Bottom Layer w0.85: U5.4 23.896,67.84 R37.1 R39.1
NetR38_2: R38.2 U5.1 | length 1.8
  Bottom Layer w0.85: U5.1 R38.2
NetR40_1: R40.1 R42.1 U6.4 | length 4.1
  Bottom Layer w0.85: R40.1 33.4,67.244 ; U6.4 33.166,67.478 33.4,67.244 ; R42.1 33.4,67.244
NetR41_2: R41.2 U6.1 | length 1.8
  Bottom Layer w0.85: U6.1 33.293,76.791 R41.2
NetR43_1: R43.1 R45.1 U7.4 | length 4.3
  Bottom Layer w0.85: U7.4 14.426,68.1 R43.1 16.126,67.6 R45.1
NetR44_2: R44.2 U7.1 | length 1.7
  Bottom Layer w0.85: U7.1 R44.2
NetR46_1: R46.1 R48.1 U8.4 | length 3.9
  Bottom Layer w0.85: R46.1 5.9,67.14 ; U8.4 6.07,67.31 5.9,67.14 ; R48.1 5.9,67.14
NetR47_2: R47.2 U8.1 | length 2.2
  Bottom Layer w0.85: R47.2 5.4,78.26 5.4,77.18 U8.1
NetR53_2: R53.2 U9.1 | length 1.7
  Bottom Layer w0.85: R53.2 U9.1
NetR54_2: R54.2 U9.2 | length 1.7
  Bottom Layer w0.85: R54.2 U9.2
NetR55_2: R55.2 U9.4 | length 1.7
  Bottom Layer w0.85: R55.2 U9.4
NetR56_2: R56.2 U9.5 | length 1.7
  Bottom Layer w0.85: R56.2 59.89,91.56 U9.5
NetR57_2: R57.2 U9.9 | length 1.9
  Bottom Layer w0.85: U9.9 R57.2
NetR58_2: R58.2 U9.10 | length 1.9
  Bottom Layer w0.85: U9.10 R58.2
NetR59_2: R59.2 U9.12 | length 1.9
  Bottom Layer w0.85: U9.12 R59.2
NetR60_2: R60.2 U9.13 | length 1.9
  Bottom Layer w0.85: U9.13 R60.2
NetR61_2: R61.2 U10.1 | length 1.9
  Bottom Layer w0.85: R61.2 24.236,101.275 U10.1
NetR62_2: R62.2 U10.3 | length 1.9
  Bottom Layer w0.85: U10.3 R62.2
NetR63_2: R63.2 U10.13 | length 1.9
  Bottom Layer w0.85: R63.2 U10.13
NetR64_2: R64.2 U10.9 | length 2
  Bottom Layer w0.85: R64.2 11.616,91.725 U10.9
RHS_Q2_1: Q5.3 R2.2 | length 28.6
  Top Layer w1: v1(77.5,41.8) 77.5,55.6 80.1,58.2 v1(82.7,58.2)
  Bottom Layer w1: v1(77.5,41.8) 77.5,40.6 77.62,40.48 R2.2 ; v1(82.7,58.2) 82.73,58.23 Q5.3
RHS_Q2_2: Q13.3 R28.2 | length 33.6
  Top Layer w1: v1(20.2,43.6) 20.225,43.625 20.225,55.625 21.3,56.7 28.5,56.7 29.9,58.1 v1(29.9,59.7)
  Bottom Layer w0.85: v1(20.2,43.6) 23.32,40.48 R28.2 ; Q13.3 29.546,61.854 29.9,61.5 v1(29.9,59.7)
RLS_Q4_1: Q6.3 R6.2 | length 44.9
  Bottom Layer w1: R6.2@90.75,20.32 R6.2 93.15,20.27 94.097,21.217 94.097,28.772 93.9,28.969 93.9,31.611 94.047,31.758 94.047,57.853 92.8,59.1 92.8,61.594 Q6.3
RLS_Q4_2: Q14.3 R34.2 | length 45.3
  Top Layer w1: v1(35,22.5) 35,40.4 37.7,43.1 37.7,57.8 39.2,59.3 v1(39.2,61.86)
  Bottom Layer w1: R34.2 v1(35,22.5) ; Q14.3 37.446,61.854 37.6,61.7 37.76,61.86 v1(39.2,61.86)
VHIGH_LHS: C7.2 Q5.1 Q7.1 Q13.1 Q15.1 R11.2 R17.1 R26.2 R37.2 R43.2 TB1.1 | length 252.4
  Top Layer w0.85: v1@73.3,68.8 73.314,68.814 v1(73.6,68.814)
  Top Layer w1.5: v1(20.7,58.736) 20.708,58.744 20.708,66.592 15.2,72.1 2.6,72.1 1.58,73.12 1.58,85.28 3.3,87 3.3,105.55 8.05,110.3 14.75,117 63.5,117 73.525,106.975 73.525,101.225 75.04,99.71 C7.2
  Top Layer w2: v1@73.6,69.1 v1(73.6,75.2)
  Bottom Layer w0.85: Q15.1@13.64,61.984 Q15.1@13.926,62.27 ; TB1.1 84.411,100.84 R26.2 R26.2@90.125,100.815
  Bottom Layer w1: Q15.1@13.926,62.27 R43.2 ; Q13.1 22.886,63.386 23.396,63.896 R37.2 ; Q7.1 68,63.924 R17.1
  Bottom Layer w2: Q15.1@13.64,62.189 13.64,61.984 13.64,60.174 15.078,58.736 v1(20.7,58.736) 22.297,58.736 22.886,59.325 Q13.1 ; Q7.1 68,58.5 68.575,57.925 76.675,57.925 77.65,58.9 Q5.1 77.65,64.506 74.994,64.506 73.6,65.9 v1(73.6,68.814) ; v1(73.6,75.2) 73.6,98.35 74.96,99.71 C7.2 80.91,99.71 82.029,100.829 TB1.1
VLOGIC: C6.1 C8.1 C9.1 U9.14 U10.14 V-REG2.3 | length 209.5
  Top Layer w1: v1(26.2,91.5) 26.375,91.5 26.375,95.085 25.375,96.085 C9.1 6,87.084 3.665,84.749 3.665,81.535 10.486,74.714 21.386,74.714 29.8,66.3 v1(53.9,66.3) 53.9,84.5 59.2,89.8 64.8,89.8 67.03,92.03 67.03,97.026 68.629,98.625 C8.1 69.4,100.9 66.9,103.4 v1(49.8,103.4)
  Top Layer w2: v1(53.9,66.3) 53.9,55.302 49.456,50.858 49.456,40.544 55.54,34.46 V-REG2.3
  Bottom Layer w1: U10.14 24.316,91.634 24.45,91.5 v1(26.2,91.5) ; U9.14 49.73,103.33 v1(49.8,103.4) ; V-REG2.3 57.04,31.79 C6.1
VLOW_LLS: C5.1 Q6.1 Q8.1 Q14.1 Q16.1 R14.2 R20.2 R40.2 R46.2 SW1.2 V-REG2.1 | length 186.3
  Top Layer w1: v1(42.422,57.25) 43.95,57.25 45.7,55.5 45.7,36.8 v1(47.8,34.7) ; v1(56.2,61.6) 56.2,56.163 56.042,56.004 56.042,37.258 v1(59.1,34.2)
  Bottom Layer w0.85: R46.2@4.75,64.41 R46.2 ; Q8.1 Q8.1@58.91,61.849 ; Q6.1 Q6.1@87.91,61.984
  Bottom Layer w1: R46.2@4.75,64.41 4.75,62.02 Q16.1 4.48,58.02 5.25,57.25 13.519,57.25 14.133,56.636 23.167,56.636 23.756,57.225 30.511,57.225 30.536,57.25 32,57.25 ; R40.2 32.056,64.356 Q14.1 32.056,57.306 32,57.25 ; v1(42.422,57.25) 32,57.25 ; 48.21,27.71 59.81,27.71 60.9,28.8 60.9,32.4 v1(59.1,34.2) ; v1(56.2,61.6) 58.579,61.6 Q8.1 58.62,58.13 61.25,55.5 84.96,55.5 87.62,58.16 Q6.1 ; Q8.1@58.91,61.849 R20.2 ; Q6.1@87.91,61.984 R14.2
  Bottom Layer w2: SW1.2 47.6,27.1 48.21,27.71 C5.1 48.21,32.5 ; v1(47.8,34.7) 48.21,34.29 48.21,32.5 ; V-REG2.1 49,33.29 48.21,32.5
VMOTOR_1: C1.A C2.1 C3.1 Q1.2 Q2.2 Q9.2 Q10.2 R23.2 ST2.1 SW1.1 V-REG1.1 | length 187.9
  Bottom Layer w1: 38.311,18.609 43.991,18.609 45.2,17.4 R23.2 ; C3.1 43.73,60.73 44.1,61.1 C1.A ; 47,53.75 46.1,54.65 C1.A ; C2.1 49.93,61.1 C1.A
  Bottom Layer w1.5: Q10.2@29,45.825 29,48.75 ; Q1.2@65.96,45.825 65.96,48.79 ; Q2.2@86,45.825 86,48.75
  Bottom Layer w2: 8.9,48.376 9.018,48.258 ; 38.311,20.77 38.39,20.691 51.909,20.691 52.27,21.053 52.27,24.871 SW1.1 ; 38.311,33 38.601,33.29 V-REG1.1
  Bottom Layer w3: 8.9,48.376 Q9.2@8.9,52.2 ; 29,48.75 Q10.2@29,52.175 ; 65.96,48.79 Q1.2@65.96,52.175 ; 86,48.75 Q2.2@86,52.175
  Bottom Layer w4: Q9.2@8.9,52.2 28.975,52.2 29,52.175 30.575,53.75 37.1,53.75 37.1,38.449 38.311,37.237 38.311,33 38.311,20.77 38.311,18.609 ST2.1 ; 37.136,53.75 47,53.75 58.488,53.75 60.063,52.175 65.96,52.175 Q2.2@86,52.175
pads on no net: U10.5 U10.6 U10.10 U10.11
copper on no net: | length 60.5
  Top Layer w0.4: 75.21,104 90.21,104 90.21,119.25 75.21,119.25 75.21,104

## Other copper
Top Layer:
  text "TOGGLE.SWITCH" at 75.46,117.25 h1.1
  text "IF  7<VCC<15 / SWITCH IS SET TO THE LEFT" at 76.46,112.25 h0.9
  text "<-------" at 77.71,110.584 h0.9
  text "VER.1" at 3.5,108 h2.7 r45
  text "IF  15<VCC<24  / SWITCH IS SET TO THE RIGHT" at 76.46,105.75 h0.9
  text "------->" at 77.71,104.25 h0.9
  text "HSV" at 78.25,86.75 h3 r90
  text "M" at 94.036,73.6 h6 r90
  text "A" at 94,70 h6 r90
  text "V1_motordriver" at 45.5,68.25 h2.5 r90
  text "CHANNEL.A" at 66,1.8 h2
  text "CHANNEL.B" at 9,1.75 h2
  text "VCC" at 30.75,0.75 h2
  text "GND" at 58,0.75 h2

## Silkscreen, mask and mechanical layers (free items; w line width, h text height)
Top Overlay:
  lines w0.3: 29.21,104.5 35.5,104.5 ; 29.21,113.594 29.21,119.25 43.797,119.25 43.797,113.548 29.257,113.548 ; 29.21,116.75 35.5,116.75 ; 32.355,101.403 32.355,104.5 ; 32.355,113.653 32.355,116.75 ; 35.5,101.298 35.5,107 ; 35.5,113.548 35.5,119.25 ; 37.75,101.298 37.75,107 ; 37.75,104.5 43.797,104.5 ; 37.75,113.548 37.75,119.25 ; 37.75,116.75 43.797,116.75 ; 40.773,101.321 40.773,104.5 ; 40.773,113.571 40.773,116.75 ; 29.21,101.344 29.21,107 43.797,107 43.797,101.298 29.257,101.298 29.21,101.344
  text "CH.B" at 30.5,117.5 h1
  text "CH.A" at 39.2,117.5 h1
  text "GND" at 37.1,115.25 h1 r90
  text "D1" at 30.25,114.75 h1
  text "D2" at 33.25,114.75 h1
  text "D1" at 38.75,114.75 h1
  text "D2" at 41.5,114.75 h1
  text "CH.B" at 30.5,105.25 h1
  text "CH.A" at 39.2,105.25 h1
  text "GND" at 37.1,102.75 h1 r90
  text "D1" at 30.25,102.5 h1
  text "D2" at 33.25,102.5 h1
  text "D1" at 38.75,102.5 h1
  text "D2" at 41.5,102.5 h1
Mechanical 1:
  the board outline again, w0.3